# Allegro board mbseq05.brd
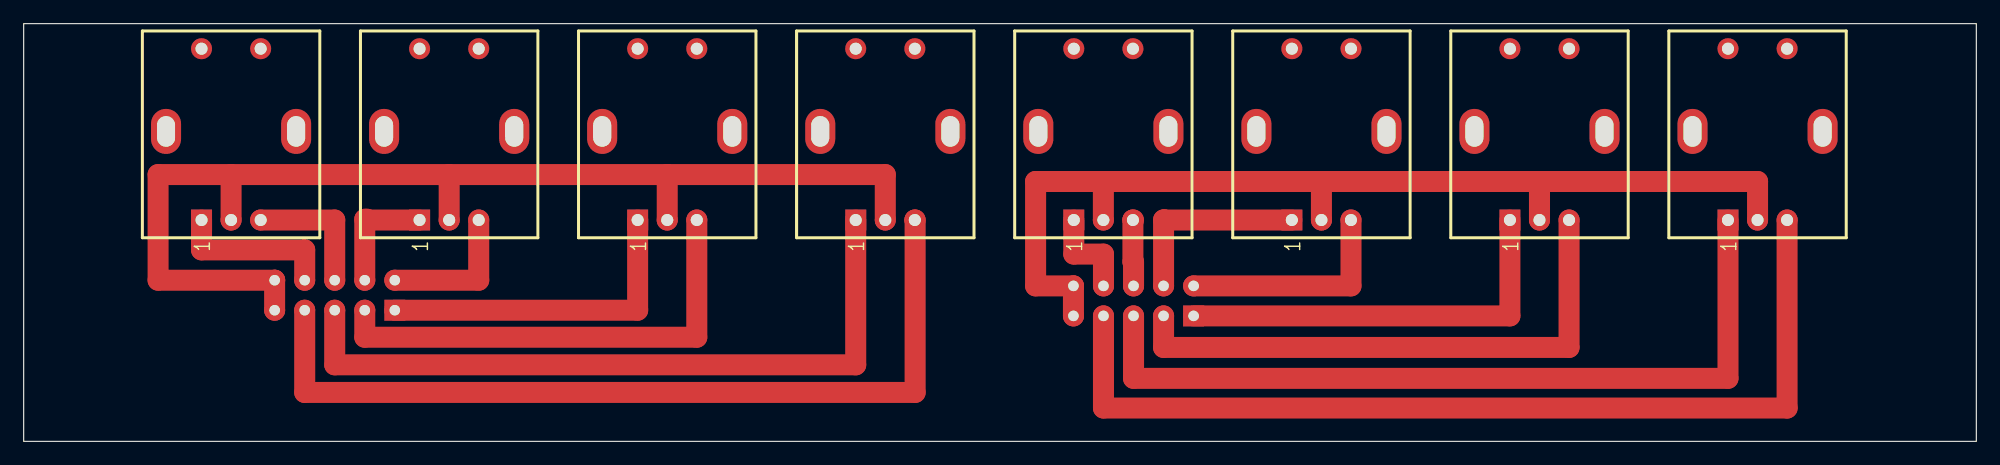
[diagram p0: board, top side]
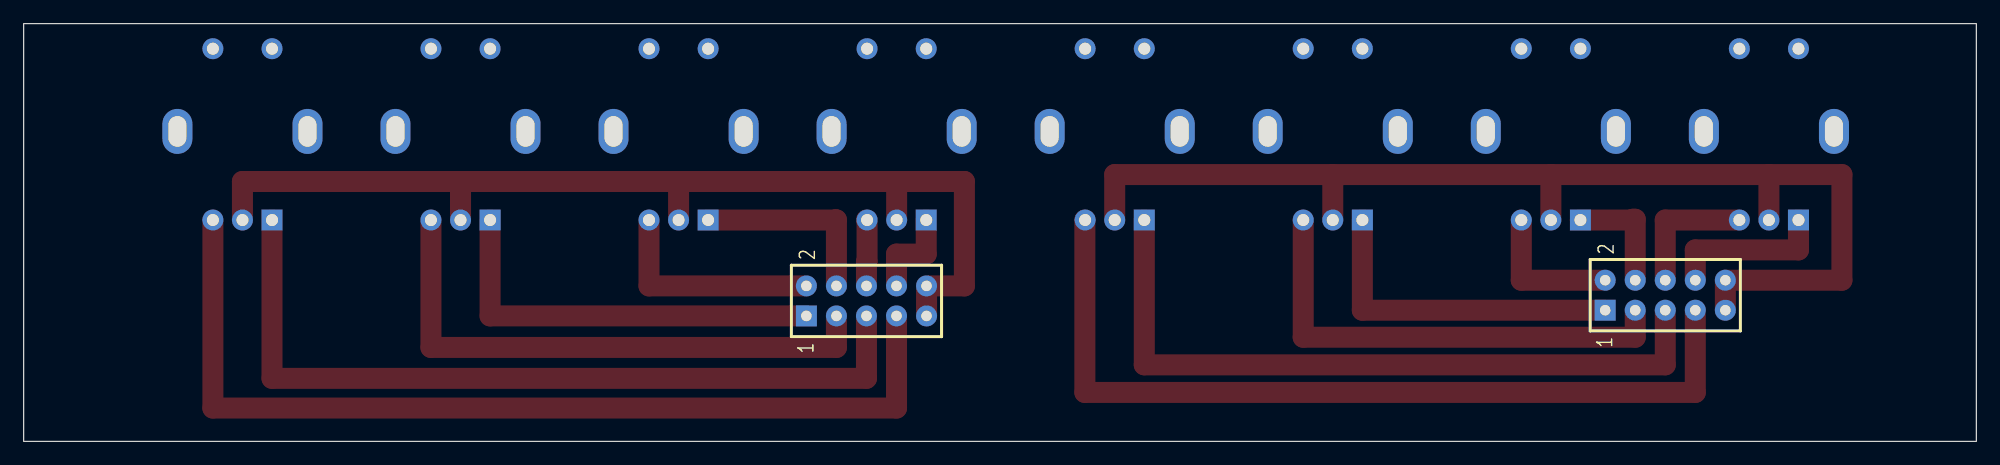
[diagram p1: board, bottom side, seen from below]

Outline 165.1 x 35.36 mm; copper layers: TOP, BOTTOM. Coordinates in mm from the lower left corner of the outline.
Outline path: rectangle 0,0 165.1,35.36

## Placement (name value [footprint] x y rotation side)
J1  534206-5  [CONN-AMP-2X5PIN-100MIL-ST]  31.38 11.1 180 bottom
J2  534206-5  [CONN-AMP-2X5PIN-100MIL-ST]  98.92 10.62 180 bottom
S1  EC11E15244  [SWITCH-EC11E15244]  17.54 25.98 90 top
S2  EC11E15244  [SWITCH-EC11E15244]  35.98 25.98 90 top
S3  EC11E15244  [SWITCH-EC11E15244]  54.41 25.98 90 top
S4  EC11E15244  [SWITCH-EC11E15244]  72.85 25.98 90 top
S5  EC11E15244  [SWITCH-EC11E15244]  91.29 25.98 90 top
S6  EC11E15244  [SWITCH-EC11E15244]  109.73 25.98 90 top
S7  EC11E15244  [SWITCH-EC11E15244]  128.16 25.98 90 top
S8  EC11E15244  [SWITCH-EC11E15244]  146.6 25.98 90 top

## Library data of the parts
J1 J2 = J_2X5_ST_AMP_534206: part number: J_2X5_ST_AMP_534206-10016967,534206-5,CONN-AMP-2X5PIN-100MIL-ST
S1-S8 = S_EC11B: part number: S_EC11B-10018475,EC11E15244,SWITCH-EC11E15244

## Footprints (pads in the part's own frame, mm; a bottom-side part is the same pattern mirrored in y, then rotated)
CONN-AMP-2X5PIN-100MIL-ST
  rect 1.778x1.778 hole 0.889: 1(0,0)
  round 1.778 hole 0.889: 2(0,2.54) 3(2.54,0) 4(2.54,2.54) 5(5.08,0) 6(5.08,2.54) 7(7.62,0) 8(7.62,2.54) 9(10.16,0) 10(10.16,2.54)
SWITCH-EC11E15244
  oval 3.81x2.54 hole 2.591x1.524: (0.25,5.5) (0.25,-5.5)
  rect 1.778x1.778 hole 1.016: 1(-7.25,2.5)
  round 1.778 hole 1.016: 2(-7.25,-2.5) 3(-7.25,0) 4(7.25,2.5) 5(7.25,-2.5)

## Nets
UNNAMED_1_J2X5ST_I10_1: J1.1 S3.1(A)
UNNAMED_1_J2X5ST_I10_2: J1.2 S2.2(B)
UNNAMED_1_J2X5ST_I10_3: J1.3 S3.2(B)
UNNAMED_1_J2X5ST_I10_4: J1.4 S2.1(A)
UNNAMED_1_J2X5ST_I10_5: J1.5 S4.1(A)
UNNAMED_1_J2X5ST_I10_6: J1.6 S1.2(B)
UNNAMED_1_J2X5ST_I10_7: J1.7 S4.2(B)
UNNAMED_1_J2X5ST_I10_8: J1.8 S1.1(A)
UNNAMED_1_J2X5ST_I10_10: J1.9 J1.10 S1.3(C) S2.3(C) S3.3(C) S4.3(C)
UNNAMED_1_J2X5ST_I11_1: J2.1 S7.1(A)
UNNAMED_1_J2X5ST_I11_2: J2.2 S6.2(B)
UNNAMED_1_J2X5ST_I11_3: J2.3 S7.2(B)
UNNAMED_1_J2X5ST_I11_4: J2.4 S6.1(A)
UNNAMED_1_J2X5ST_I11_5: J2.5 S8.1(A)
UNNAMED_1_J2X5ST_I11_6: J2.6 S5.2(B)
UNNAMED_1_J2X5ST_I11_7: J2.7 S8.2(B)
UNNAMED_1_J2X5ST_I11_8: J2.8 S5.1(A)
UNNAMED_1_J2X5ST_I11_10: J2.9 J2.10 S5.3(C) S6.3(C) S7.3(C) S8.3(C)

Pads without a net: S1 4 5; S2 4 5; S3 4 5; S4 4 5; S5 4 5; S6 4 5; S7 4 5; S8 4 5

## Routing (per net, layer and track width the routed paths; a pad name or vN(x,y) marks a point on that pad's centre or on a via; arc(x,y) is an arc through that point)
UNNAMED_1_J2X5ST_I10_1: length 28.2
  TOP w1.778: S3.1 51.91,11.1 J1.1
UNNAMED_1_J2X5ST_I10_2: length 12.2
  TOP w1.778: S2.2 38.48,13.64 J1.2
UNNAMED_1_J2X5ST_I10_3: length 40.3
  TOP w1.778: S3.2 56.91,8.81 28.84,8.81 J1.3
UNNAMED_1_J2X5ST_I10_4: length 9.9
  TOP w1.778: S2.1 29.04,18.73 29.04,18.8 28.84,18.8 J1.4
UNNAMED_1_J2X5ST_I10_5: length 60.9
  TOP w1.778: J1.5 26.3,6.48 70.35,6.48 S4.1
UNNAMED_1_J2X5ST_I10_6: length 11.4
  TOP w1.778: S1.2 26.3,18.73 J1.6
UNNAMED_1_J2X5ST_I10_7: length 73.2
  TOP w1.778: J1.7 23.76,4.14 75.37,4.14 75.37,18.73 S4.2
UNNAMED_1_J2X5ST_I10_8: length 13.8
  TOP w1.778: S1.1 15.04,16.21 23.76,16.21 J1.8
UNNAMED_1_J2X5ST_I10_10: length 98.2
  TOP w1.778: 54.41,22.58 35.98,22.58 ; 54.41,22.58 S3.3 ; 54.41,22.58 72.85,22.58 S4.3 ; 35.98,22.58 17.54,22.58 ; 35.98,22.58 S2.3 ; 17.54,22.58 11.37,22.58 11.37,13.64 J1.10 J1.9 ; 17.54,22.58 S1.3
UNNAMED_1_J2X5ST_I11_1: length 34.9
  TOP w1.778: S7.1 125.66,10.62 J2.1
UNNAMED_1_J2X5ST_I11_2: length 18.9
  TOP w1.778: S6.2 112.23,13.16 J2.2
UNNAMED_1_J2X5ST_I11_3: length 47.7
  TOP w1.778: J2.3 96.38,7.95 130.66,7.95 S7.2
UNNAMED_1_J2X5ST_I11_4: length 16.4
  TOP w1.778: S6.1 96.46,18.73 96.46,18.75 96.38,18.75 J2.4
UNNAMED_1_J2X5ST_I11_5: length 68.9
  TOP w1.778: S8.1 144.1,5.33 93.84,5.33 J2.5
UNNAMED_1_J2X5ST_I11_6: length 5.7
  TOP w1.778: J2.6 93.84,15.19 93.79,15.19 S5.2 93.84,18.73
UNNAMED_1_J2X5ST_I11_7: length 81.5
  TOP w1.778: S8.2 149.1,2.82 91.3,2.82 J2.7
UNNAMED_1_J2X5ST_I11_8: length 8.1
  TOP w1.778: S5.1 88.79,15.85 91.3,15.85 J2.8
UNNAMED_1_J2X5ST_I11_10: length 88.7
  TOP w1.778: S5.3 91.29,22 ; 91.29,22 109.73,22 ; 91.29,22 85.56,22 85.56,13.16 J2.10 J2.9 ; S6.3 109.73,22 ; 109.73,22 128.16,22 ; S8.3 146.6,22 128.16,22 ; 128.16,22 S7.3
